# Altium PCB camadapter.PcbDoc
Units mm, origin at the board's own origin, x right, y up, seen from the top; angles counter-clockwise.
Board outline 37.6 x 30.2 mm, 4 copper layers (Top Layer, Int1 (GND), Int2 (PWR), Bottom Layer), stack 1.369 mm thick; 7 components, 27 nets, 87 pads, 4 vias.
Unrouted connection lines stored in the file: 36.
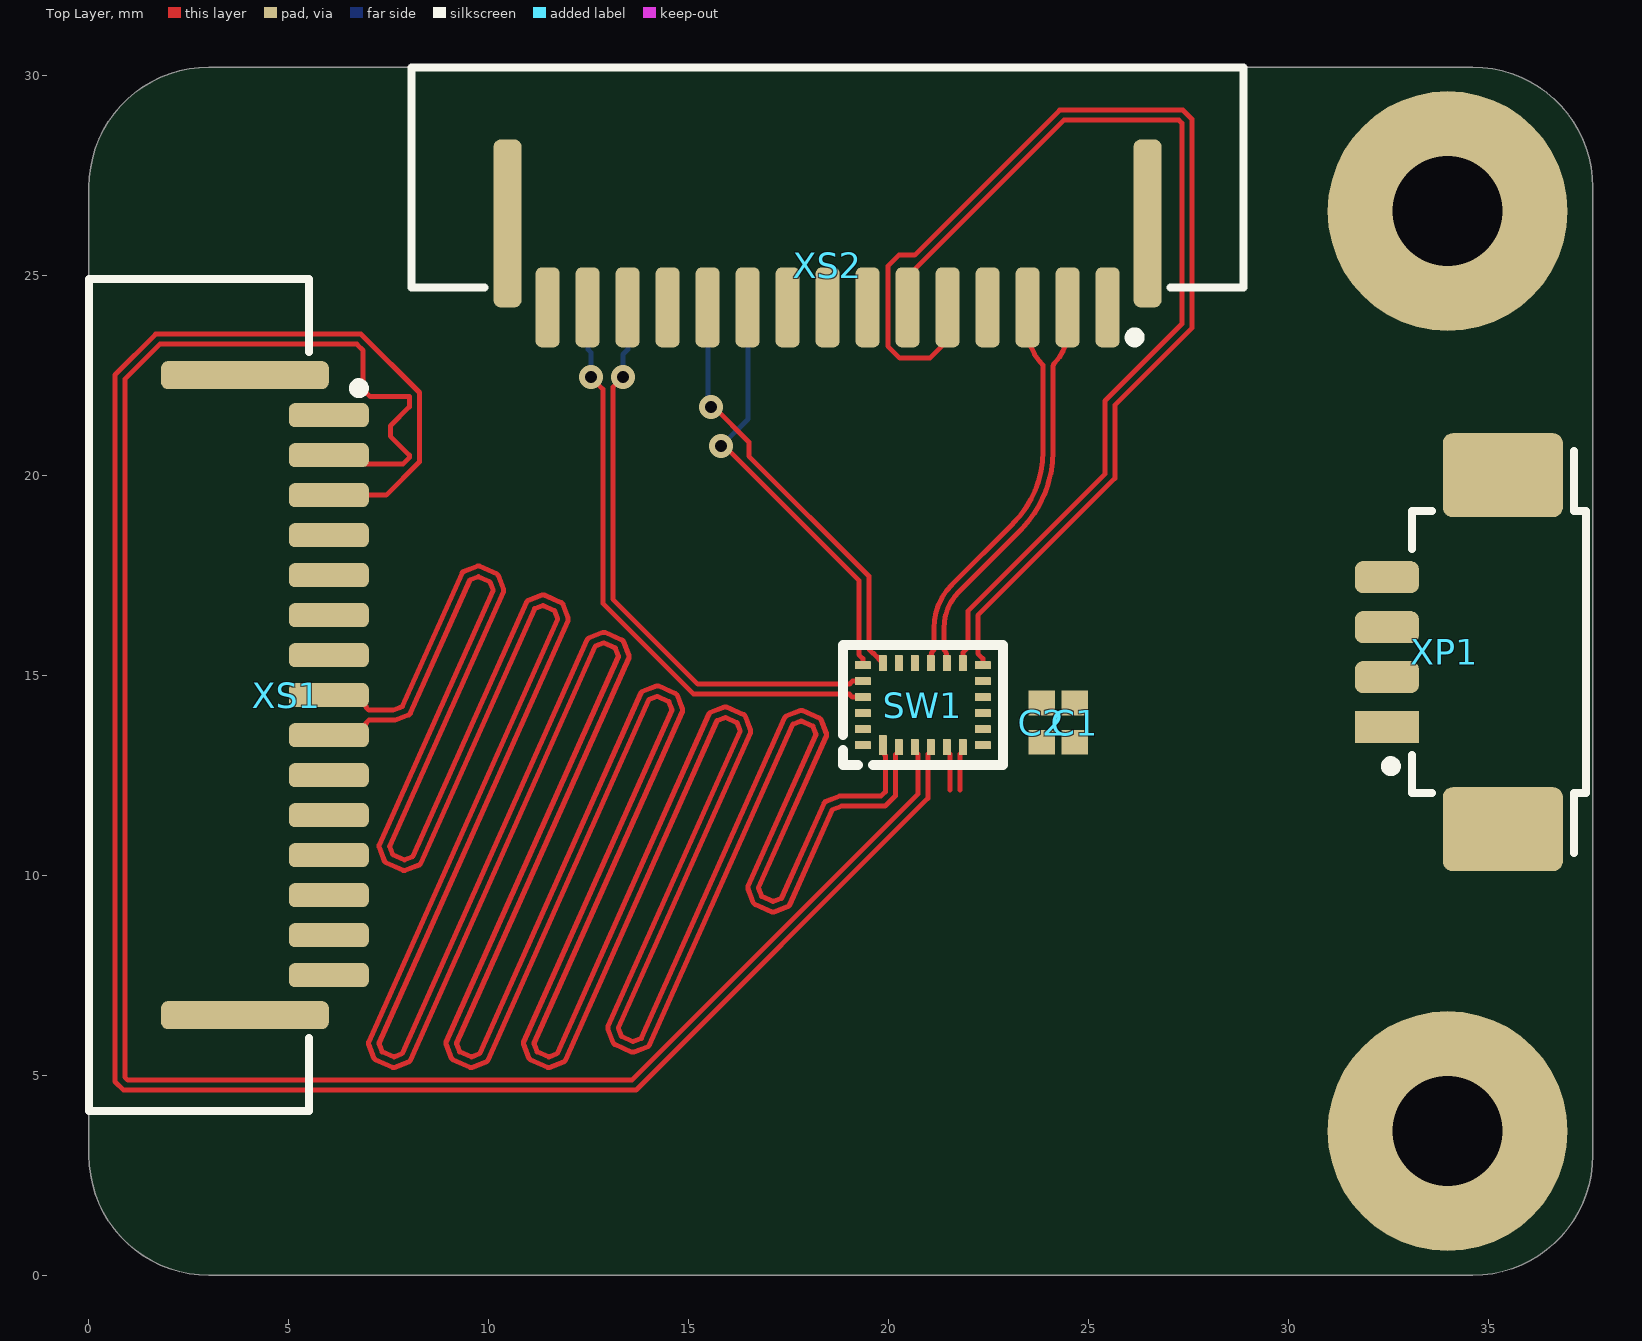
[diagram p0: Top Layer view]
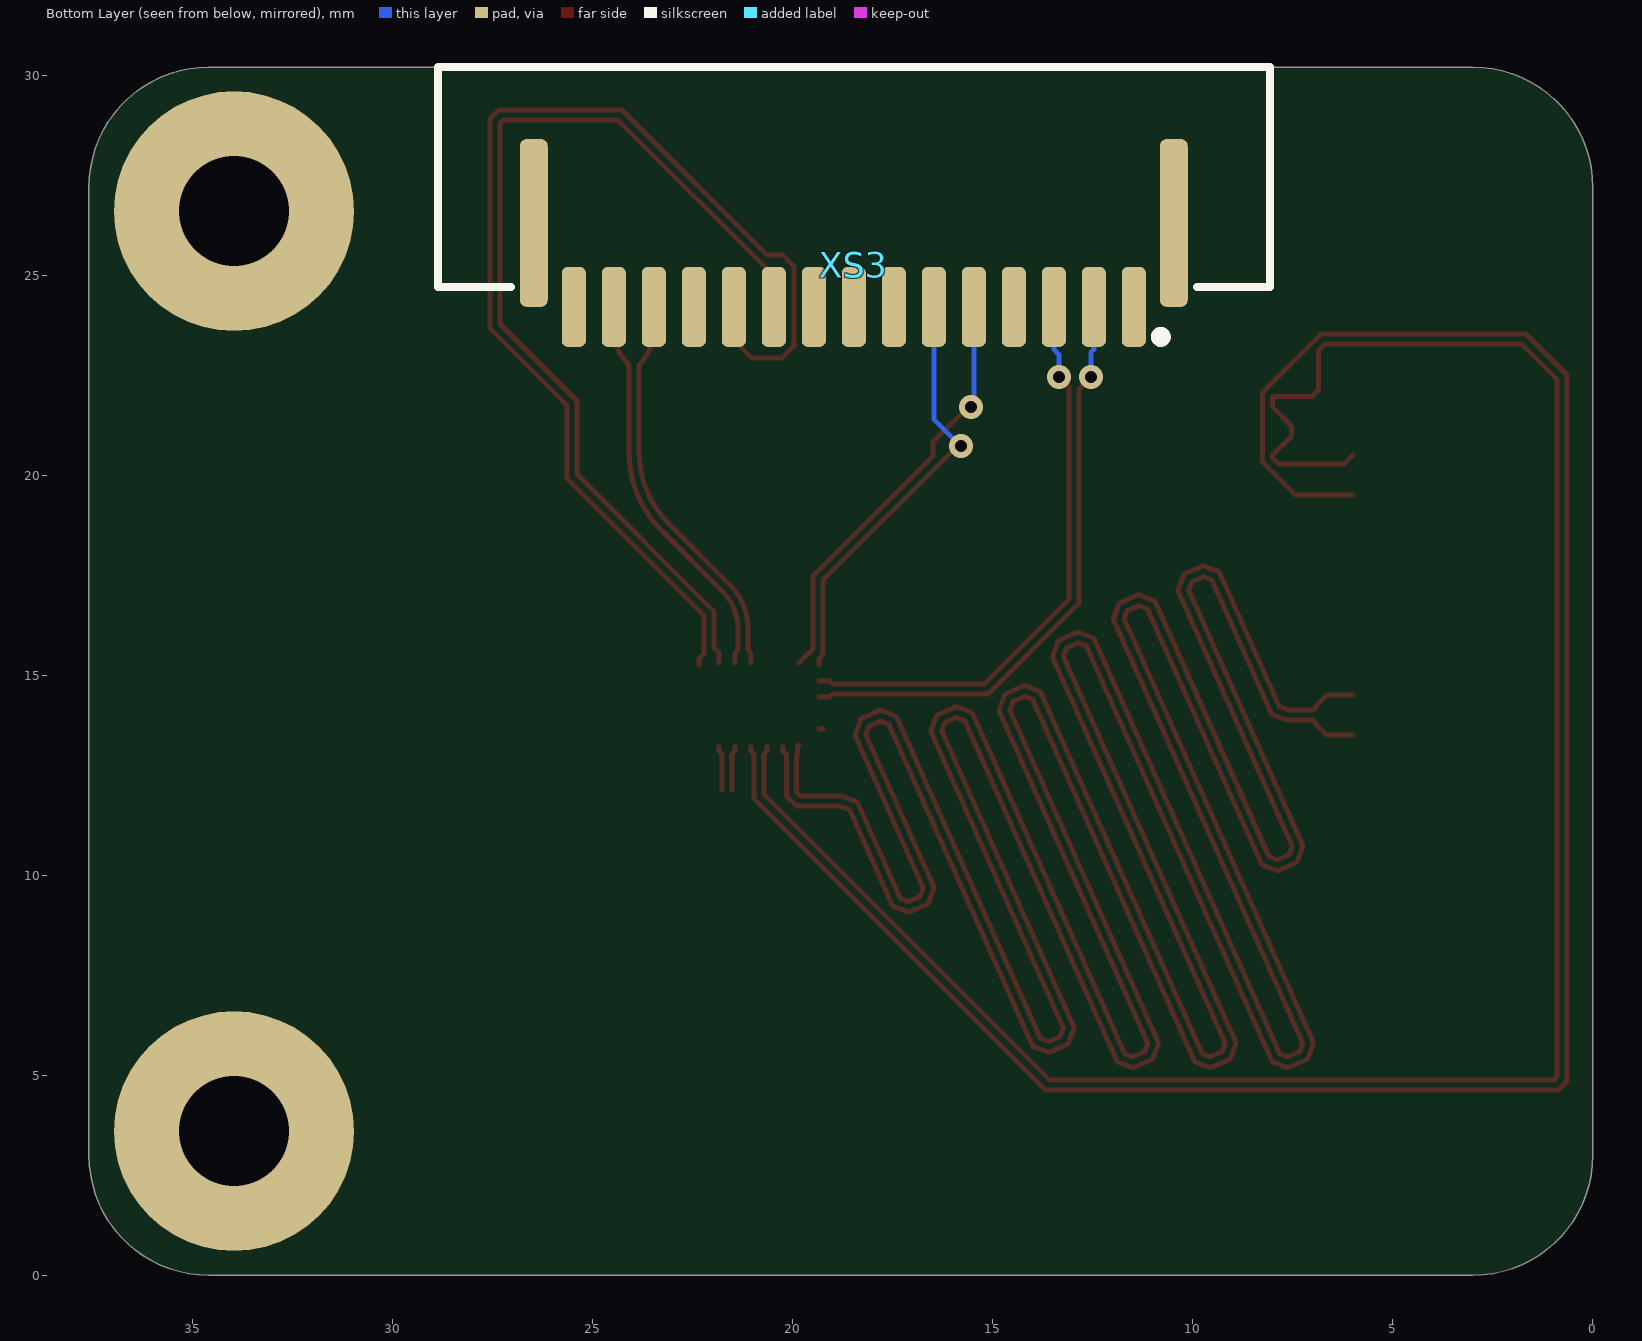
[diagram p1: Bottom Layer view, seen from below]
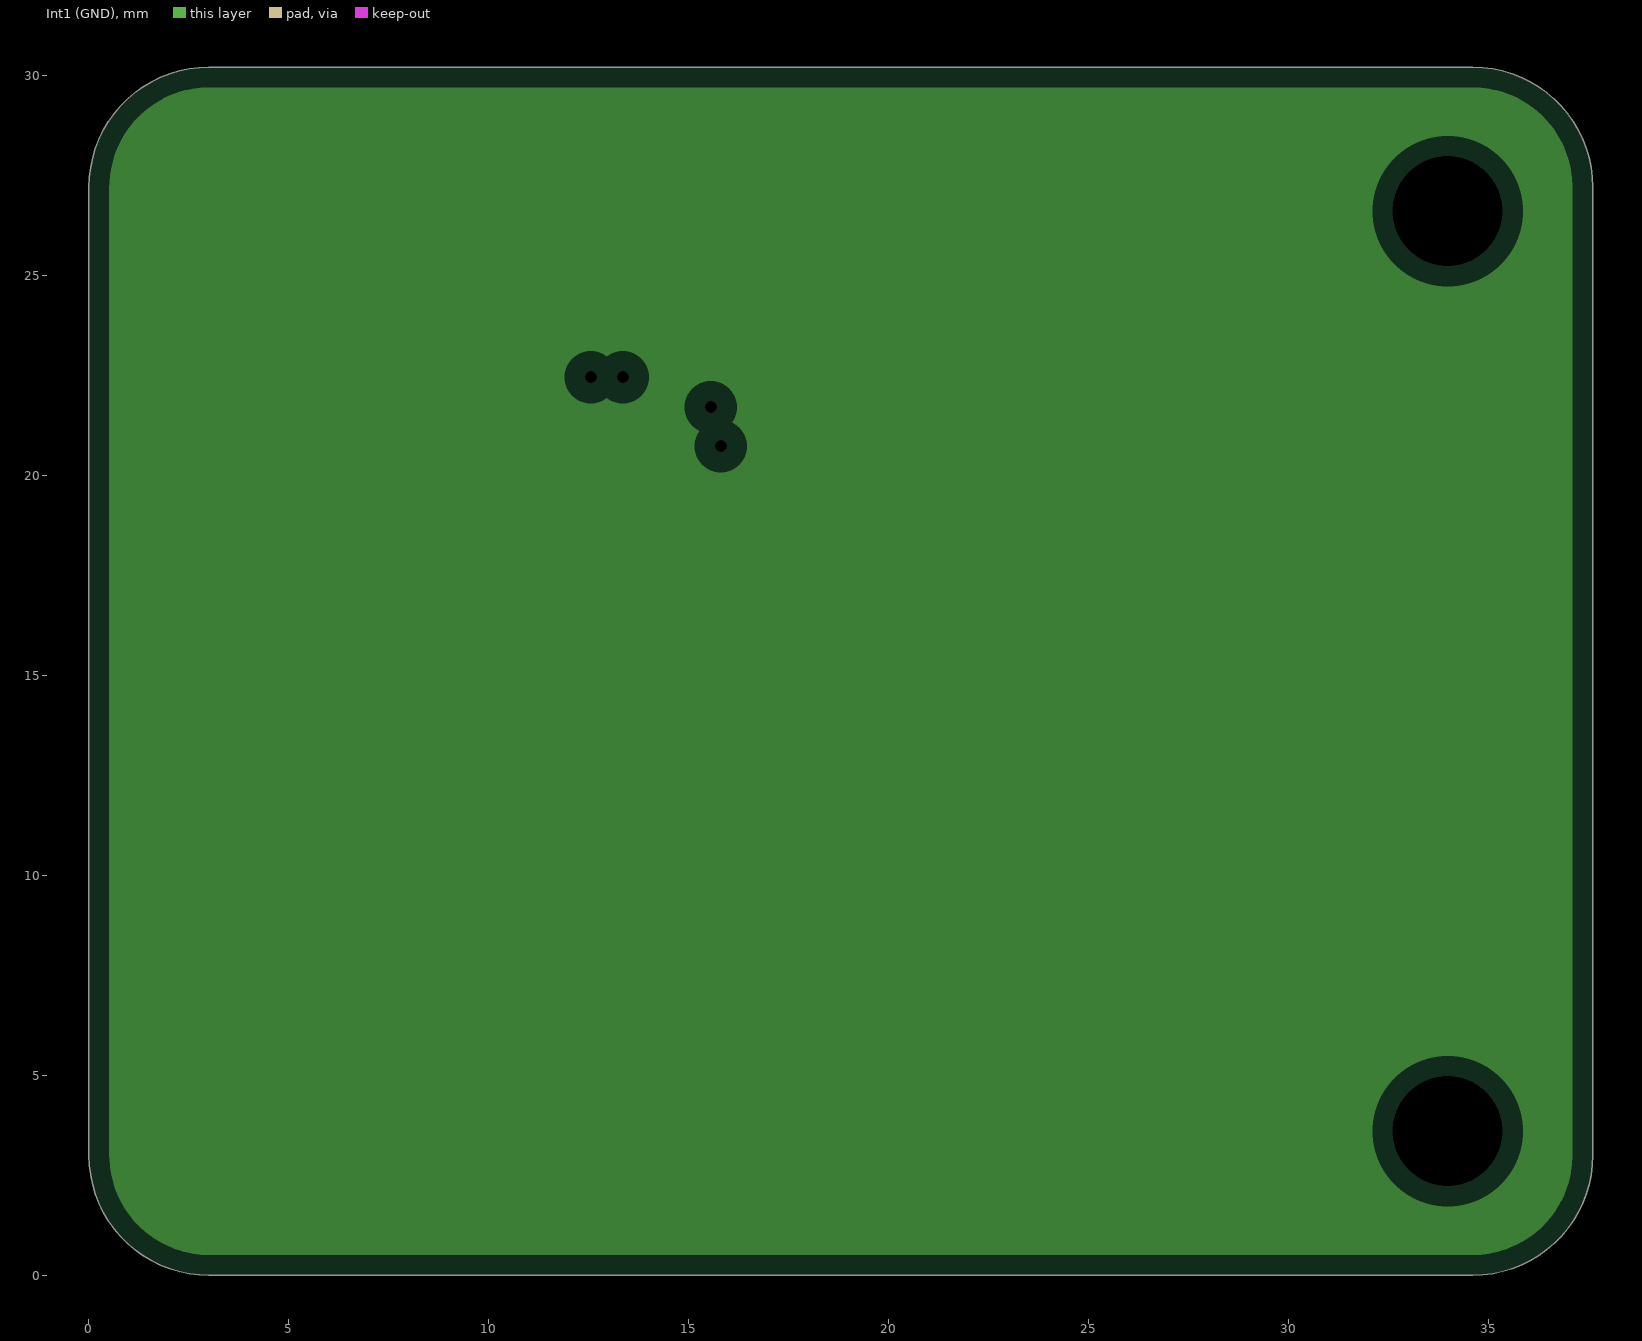
[diagram p2: Int1 (GND), clearances drawn from the general rule]
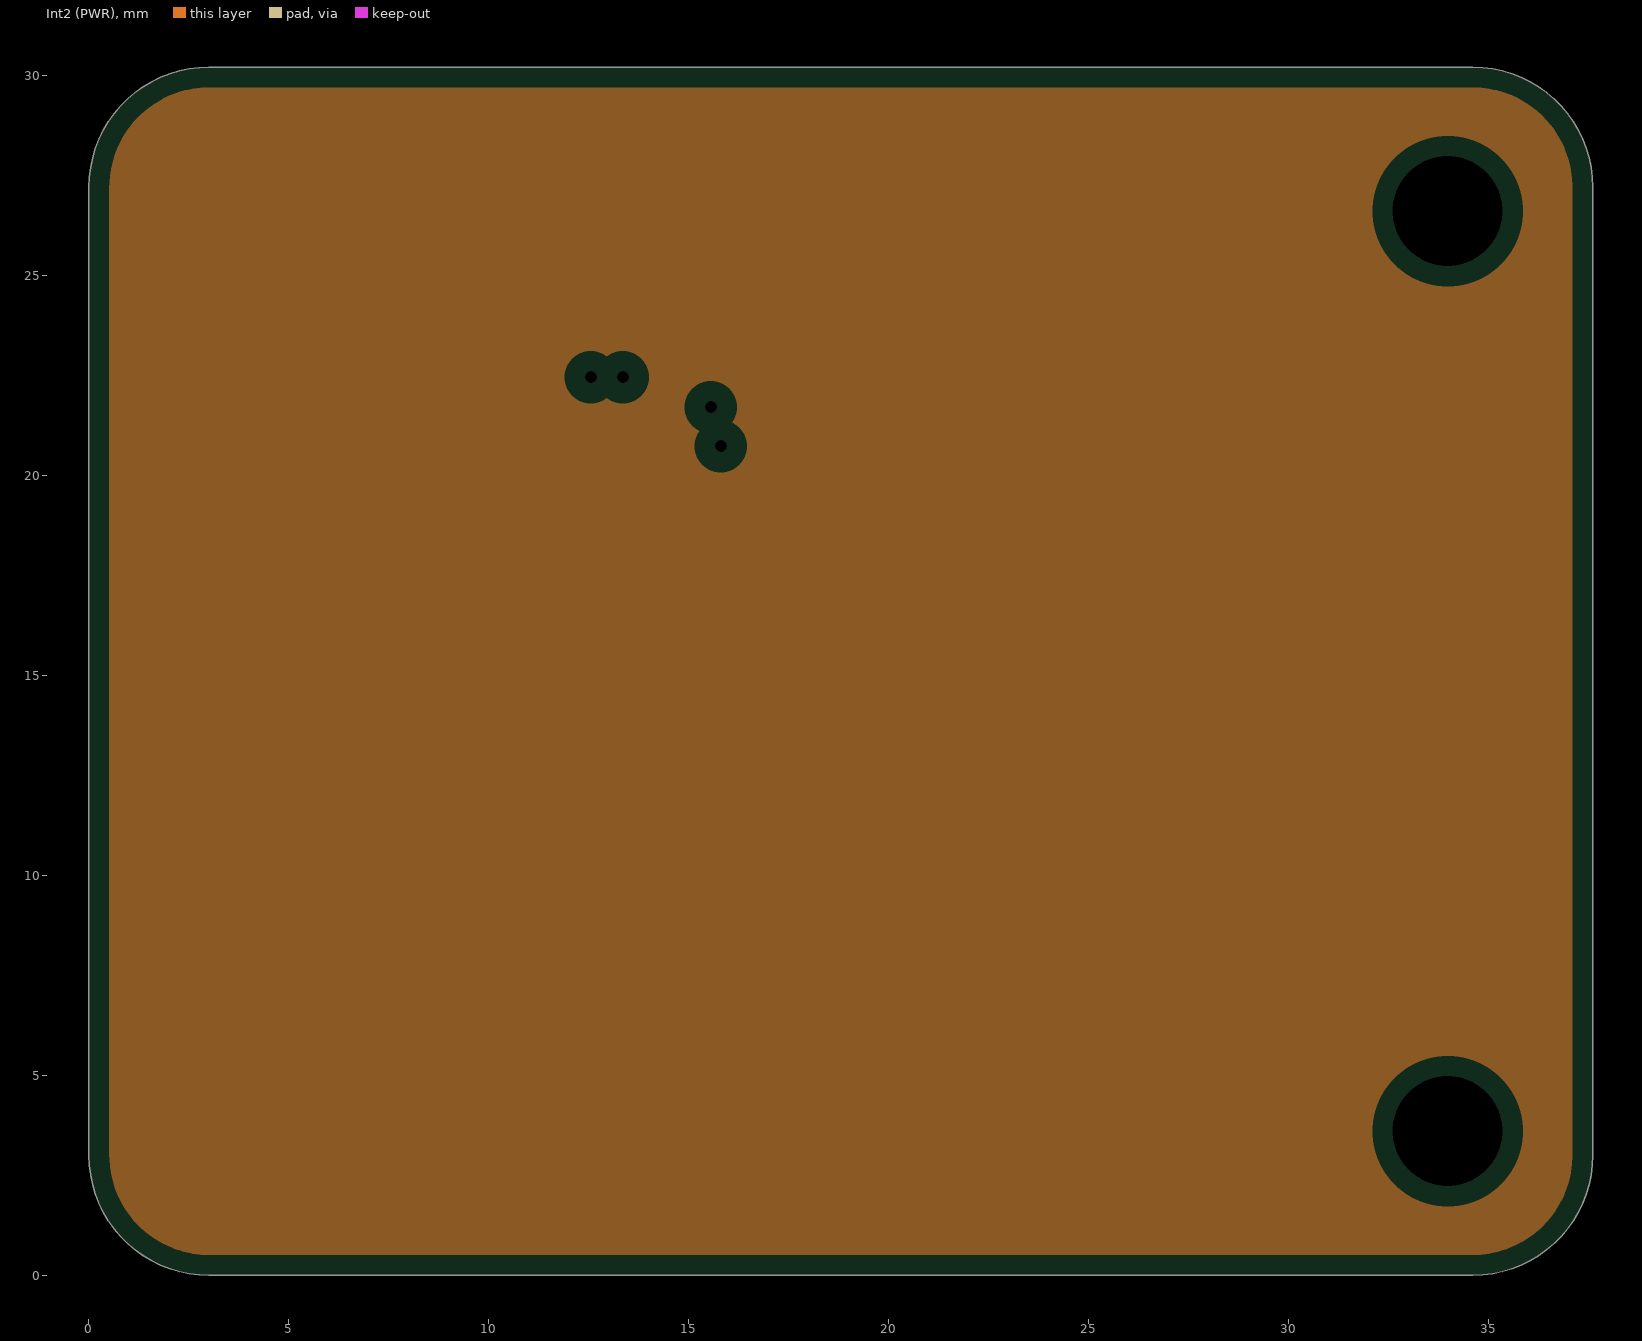
[diagram p3: Int2 (PWR), clearances drawn from the general rule]

## Layer stack, top to bottom
Top Solder: solder mask 0.0254, SM-001, Dk 4
Top Layer: signal copper 0.035
Dielectric 1: prepreg 0.1295, PP-017, Dk 4.3
Dielectric 2: prepreg 0.1295, PP-017, Dk 4.3
Int1 (GND): plane copper 0.035
Dielectric 3: core 0.7112, Core-039, Dk 4.8
Int2 (PWR): plane copper 0.035
Dielectric 4: prepreg 0.1295, PP-017, Dk 4.3
Dielectric 5: prepreg 0.1295, PP-017, Dk 4.3
Bottom Layer: signal copper 0.035
Bottom Solder: solder mask 0.0254, SM-001, Dk 4

## Board outline
0,3 ccw(c3,3) 3,0 34.6,0 ccw(c34.6,3) 37.6,3 37.6,27.2 ccw(c34.6,27.2) 34.6,30.2 3,30.2 ccw(c3,27.2) 0,27.2

## Design rules (kind name [scope] priority, off if disabled: settings)
Clearance [All] p1: gap=0.254 ignorepadtopadclearanceinfootprint=FALSE except(0: Arc-Hole Track-Hole SMDPad-Hole THPad-Hole Via-Hole Fill-Hole Poly-Hole Region-Hole Text-Hole; 0.1: Arc-Arc Arc-Track Arc-SMDPad Track-Track Track-SMDPad SMDPad-SMDPad; 0.2: Arc-Via Track-Via Via-Via)
DiffPairsRouting [All] p1: maxlimit=0.127 minlimit=0.127 mostfreqgap=0.127 toplayer_minwidth=0.125 toplayer_maxwidth=0.125 toplayer_prefwidth=0.125 bottomlayer_minwidth=0.125 bottomlayer_maxwidth=0.125 bottomlayer_prefwidth=0.125 impedanceprofiledriven=TRUE impedanceprofileid={53F7F798-1639-471B-9D0C-301AD18E4F0E} impedanceprofilevalue=50.000000 maxuncoupledlength=1
HoleSize [All] p1: absolutevalues=TRUE maxlimit=3 minlimit=0.025 maxpercent=80.000 minpercent=20.000
MatchedLengths MatchedLengths_within [All] p1: tolerance=1.5 checknetsindiffpair=TRUE checkdiffpairvsdiffpair=FALSE checkxsignals=FALSE checkothers=FALSE
MatchedLengths MatchedLengths_D1 [InNetClass('1D','D')] p2: tolerance=2 checknetsindiffpair=FALSE checkdiffpairvsdiffpair=TRUE checkxsignals=TRUE checkothers=TRUE
MinimumSolderMaskSliver [All] p1: minsoldermaskwidth=0.1
PlaneClearance [All] p1: clearance=0.508
PlaneConnect [All] p1: planeconnectstyle=Relief reliefexpansion=0.508 reliefentries=4 reliefconductorwidth=0.254 reliefairgap=0.254
PolygonConnect [All] p1: connectstyle=Relief reliefconductorwidth=0.254 reliefentries=4 polygonreliefangle="90 Angle" airgapwidth=0.254
RoutingVias [All] p1: holewidth=0.3 width=0 viastyle="Through Hole" minholewidth=0.2 minwidth=0.6 maxholewidth=0.3 maxwidth=0.6
SilkToSilkClearance [All] p1: silktosilkclearance=0.1
SilkToSolderMaskClearance [IsPad] p1: minsilkscreentomaskgap=0.1 clearancetoexposedcopper=TRUE
SolderMaskExpansion [All] p1: expansion=0.102 istentingtop=FALSE
Width [All] p1: maxlimit=1 minlimit=0.1 preferedwidth=0.254
23 further rules are at their usual default settings.

## Classes and differential pairs
net class D: 1D_N 1D_P 2D_N 2D_P
net class D2: 1D2_N 1D2_P 2D2_N 2D2_P
net class D1: 1D1_N 1D1_P 2D1_N 2D1_P
differential pair CLK: +CLK_P -CLK_N
differential pair CLK2: +CLK2_P -CLK2_N
differential pair CLK1: +CLK1_P -CLK1_N
differential pair 2D: +2D_P -2D_N
differential pair 2D2: +2D2_P -2D2_N
differential pair 2D1: +2D1_P -2D1_N
differential pair 1D: +1D_P -1D_N
differential pair 1D2: +1D2_P -1D2_N
differential pair 1D1: +1D1_P -1D1_N

## Components (designator, comment, footprint, x,y, rotation, side; value= is the part's Value field where it differs from the comment)
C1 "100nF" Cap_0402_N 24.65,13.815 r270 top
C2 "2.2uF" Cap_0402_N 23.825,13.815 r270 top
SW1 "NX3DV642" NX3DV642 20.85,14.25 r90 top
XP1 "653104131822" 653104131822_D_arch 35.25,15.575 r90 top
XS1 "SFW15R-1STE1LF" SFW15R-1STE1LF_D 3.9,14.5 r270 top
XS2 "SFW15R-1STE1LF" SFW15R-1STE1LF_D 18.47,26.295 r180 top
XS3 "SFW15R-1STE1LF" SFW15R-1STE1LF_D 18.477,26.307 r0 bottom

## Footprints (in the part's own frame and the unit in brackets; to place one, negate y for a bottom-side part, rotate by r counter-clockwise, add the part's x,y. Pads: shape width x height; smd on the part's side, far side on the other; paste and mask are expansions set on the pad)
653104131822_D_arch [mm] "1.25mm SMT Male Horizontal Shrouded Header, 4p"
  rect 0.8x1.6 smd: 1(-1.875,2.8)
  rrect50% 0.8x1.6 smd: 2(-0.625,2.8) 3(0.625,2.8) 4(1.875,2.8)
  rrect23% 2.1x3 smd: MP1(-4.425,-0.1) MP2(4.425,-0.1)
  silkscreen extent -5.02,-2.17 5.02,2.82, body extent -4.88,-2.1 4.88,3.3, height 3.4
Cap_0402_N [mm] "Chip Capacitor, 2-Leads, Body 1,05x0,54mm, IPC Medium Density"
  rect 0.62x0.66 smd: 1(-0.49,0) 2(0.49,0)
  body extent -0.5,-0.26 0.5,0.27, height 0.36
NX3DV642 [mm]
  rrect10% 0.5x0.2 smd mask+0.05: 1(-1,1)
  rrect10% 0.4x0.2 smd mask+0.05: 2(-1.05,0.6) 3(-1.05,0.2) 4(-1.05,-0.2) 5(-1.05,-0.6) 6(-1.05,-1) 13(1.05,-1) 14(1.05,-0.6) 15(1.05,-0.2) 16(1.05,0.2) 17(1.05,0.6) 18(1.05,1)
  rrect10% 0.2x0.4 smd mask+0.05: 7(-1,-1.5) 8(-0.6,-1.5) 9(-0.2,-1.5) 10(0.2,-1.5) 11(0.6,-1.5) 12(1,-1.5) 19(1,1.5) 20(0.6,1.5) 21(0.2,1.5) 22(-0.2,1.5) 23(-0.6,1.5) 24(-1,1.5)
  silkscreen extent -1.5,-2 1.5,2
SFW15R-1STE1LF_D [mm] "FFC/FPC connector, 15-Pins, Right Angle, Body 20.8x5.5mm, Datasheet dimentions"
  rrect50% 0.6x2 smd: 1(-7,2.1) 2(-6,2.1) 3(-5,2.1) 4(-4,2.1) 5(-3,2.1) 6(-2,2.1) 7(-1,2.1) 8(0,2.1) 9(1,2.1) 10(2,2.1) 11(3,2.1) 12(4,2.1) 13(5,2.1) 14(6,2.1) 15(7,2.1)
  rrect50% 0.7x4.2 smd: MP1(-8,0) MP2(8,0)
  silkscreen extent -10.4,-3.9 10.4,2.98, body extent -10.4,-3.9 10.4,2.6

## Part data
C1 C2: library part Cap_0402, "Capacitor", Part Number="Capacitor 0402", Type=Capacitor
XP1: "Header, Pins, 4 Contacts, SMD, R/A, 0,049\" (1,25mm)."
XS1 XS2 XS3: "FFC-FPC Connector, 15 Contacts, SMD, R/A, 0.039\" (1.00mm)."

## Free pads (board coordinates)
  round 6 hole 2.75: MOUNT(33.97,3.6) MOUNT(33.97,26.6)

## Via types
v1: diameter 0.6, hole 0.3, Top Layer to Bottom Layer, 4 vias

## Nets (pads, with @x,y where several pads share a name; then routed paths per layer and width w, separated by ;. In a path a pad name is that pad's centre, name@x,y a point inside that pad or via, vN(x,y) a via of type N, cw(c..) or ccw(c..) an arc to the next point about the centre after c; other vN are vias at no path point)
1D1_N: SW1.14 XS2.2 | length 10
  Top Layer w0.125: SW1.14 21.45,15.457 ccw(c21.197,15.457) 21.376,15.637 21.376,16.175 cw(c22.661,16.175) 21.752,17.084 23.284,18.616 ccw(c21.31,20.59) 24.102,20.59 24.102,22.7 cw(c24.256,22.7) 24.147,22.81 ccw(c23.368,23.589) 24.47,23.589 XS2.2
1D1_P: SW1.15 XS2.3 | length 10
  Top Layer w0.125: SW1.15 21.05,15.457 cw(c21.303,15.457) 21.124,15.637 21.124,16.175 cw(c22.661,16.175) 21.574,17.262 23.106,18.793 ccw(c21.31,20.59) 23.85,20.59 23.85,22.752 cw(c24.768,23.67) 23.47,23.67 XS2.3
1D2_N: SW1.21 XS3.2 | length 15
  Top Layer w0.125: v1(12.55,22.45) 12.85,22.15 12.85,16.794 15.12,14.524 19.013,14.524 19.088,14.45 SW1.21
  Bottom Layer w0.125: XS3.2 12.477,23.145 12.55,23.072 v1(12.55,22.45)
1D2_P: SW1.20 XS3.3 | length 14.6
  Top Layer w0.125: v1(13.35,22.45) 13.1,22.2 13.1,16.9 15.224,14.776 19.013,14.776 19.088,14.85 SW1.20
  Bottom Layer w0.125: v1(13.35,22.45) 13.35,23.018 13.477,23.145 XS3.3
1D_N: SW1.3 XS1.2 | length 54.2
  Top Layer w0.125: XS1.2 6.225,20.275 7.85,20.275 8.013,20.438 8.013,20.5 7.535,20.977 7.535,21.231 8.013,21.709 8.013,21.963 7.036,21.963 6.857,22.142 6.857,23.118 6.813,23.163 6.7,23.275 1.775,23.275 0.9,22.4 0.9,4.948 0.973,4.875 13.574,4.875 20.724,12.025 20.724,12.738 20.724,13.026 20.65,13.1 SW1.3
1D_P: SW1.4 XS1.3 | length 55.4
  Top Layer w0.125: XS1.3 7.431,19.5 8.264,20.333 8.264,22.067 6.804,23.527 1.671,23.527 0.648,22.504 0.648,4.844 0.869,4.623 13.678,4.623 20.976,11.921 20.976,12.634 20.976,13.026 21.05,13.1 SW1.4
2D1_N: SW1.12 XS2.5 | length 29.9
  Top Layer w0.125: XS2.5 21.47,23.37 21.025,22.925 20.275,22.925 19.975,23.225 19.975,25.225 20.25,25.5 20.644,25.5 24.271,29.127 27.353,29.127 27.575,28.904 27.575,23.675 25.65,21.75 25.65,19.919 22.226,16.495 22.226,15.537 22.35,15.412 SW1.12
2D1_P: SW1.13 XS2.6 | length 25
  Top Layer w0.125: XS2.6 20.47,24.97 24.375,28.875 27.248,28.875 27.323,28.8 27.323,23.779 25.398,21.854 25.398,20.023 21.974,16.599 21.974,15.687 21.85,15.562 SW1.13
2D2_N: SW1.18 XS3.5 | length 10.8
  Top Layer w0.125: v1(15.55,21.7) 15.631,21.7 16.5,20.831 16.5,20.475 19.502,17.473 19.502,17.082 19.502,15.648 19.611,15.539 19.623,15.539 19.739,15.423 19.739,15.411 SW1.18
  Bottom Layer w0.125: XS3.5 15.477,21.773 v1(15.55,21.7)
2D2_P: SW1.19 XS3.6 | length 10.8
  Top Layer w0.125: v1(15.8,20.725) 15.894,20.725 19.25,17.369 19.25,16.794 19.25,16.444 19.25,16.275 19.25,15.512 19.35,15.412 SW1.19
  Bottom Layer w0.125: v1(15.8,20.725) 16.477,21.402 XS3.6
2D_N: SW1.5 XS1.5 | length 1.1
  Top Layer w0.125: SW1.5 21.45,13.1 21.524,13.026 21.524,12.788 21.524,12.125
2D_P: SW1.6 XS1.6 | length 1.1
  Top Layer w0.125: 21.776,12.125 21.776,12.684 21.776,13.026 21.85,13.1 SW1.6
3V3: C1.2 C2.2 XP1.1 XS1.15 XS2.15 XS3.15
CLK1_N: SW1.17 XS2.8
CLK1_P: SW1.16 XS2.9
CLK2_N: SW1.23 XS3.8 | length 0.1
  Top Layer w0.125: SW1.23@19.25,13.65 SW1.23
CLK2_P: SW1.22 XS3.9 | length 0.7
  Bottom Layer w0.125: XS3.9 XS3.9@19.477,24.86
CLK_N: SW1.1 XS1.8 | length 121.1
  Top Layer w0.125: XS1.8 6.653,14.5 6.926,14.227 6.926,14.199 6.999,14.126 7.169,14.126 7.601,14.126 7.837,14.216 9.33,17.555 9.365,17.59 9.718,17.725 9.768,17.725 10.198,17.533 10.233,17.498 10.368,17.145 10.368,17.095 7.519,10.72 7.599,10.511 7.887,10.382 8.096,10.462 10.944,16.833 10.98,16.869 11.333,17.004 11.383,17.004 11.812,16.812 11.848,16.776 11.982,16.423 11.982,16.373 7.254,5.794 7.334,5.585 7.623,5.456 7.831,5.536 12.464,15.9 12.499,15.935 12.852,16.07 12.902,16.07 13.332,15.878 13.367,15.842 13.502,15.489 13.502,15.439 9.191,5.794 9.271,5.585 9.559,5.456 9.768,5.536 13.802,14.561 13.838,14.596 14.191,14.731 14.241,14.731 14.67,14.539 14.706,14.504 14.841,14.151 14.841,14.101 11.128,5.794 11.208,5.585 11.496,5.456 11.705,5.536 15.504,14.035 15.539,14.07 15.892,14.205 15.942,14.205 16.372,14.013 16.407,13.978 16.542,13.625 16.542,13.575 13.236,6.178 13.316,5.969 13.605,5.84 13.814,5.919 17.402,13.947 17.437,13.982 17.79,14.117 17.84,14.117 18.27,13.925 18.305,13.89 18.44,13.537 18.44,13.487 16.739,9.68 16.818,9.471 17.107,9.342 17.316,9.422 18.381,11.805 18.417,11.84 18.77,11.975 19.055,11.975 19.8,11.975 19.91,12.085 19.91,12.989 19.888,13.012 19.888,13.212 SW1.1
CLK_P: SW1.2 XS1.9 | length 121.4
  Top Layer w0.125: XS1.9 6.653,13.5 6.926,13.773 6.926,13.801 6.999,13.874 7.056,13.874 7.648,13.874 8.001,14.009 8.036,14.045 9.529,17.383 9.738,17.463 10.026,17.334 10.106,17.125 7.257,10.751 7.257,10.701 7.392,10.348 7.427,10.312 7.857,10.12 7.907,10.12 8.26,10.255 8.295,10.291 11.143,16.662 11.352,16.742 11.641,16.613 11.721,16.404 6.992,5.825 6.992,5.775 7.127,5.422 7.162,5.386 7.592,5.194 7.642,5.194 7.995,5.329 8.03,5.365 12.663,15.728 12.872,15.808 13.16,15.679 13.24,15.47 8.929,5.825 8.929,5.775 9.064,5.422 9.099,5.386 9.529,5.194 9.579,5.194 9.932,5.329 9.967,5.365 14.001,14.39 14.21,14.469 14.499,14.34 14.579,14.131 10.866,5.825 10.866,5.775 11.001,5.422 11.036,5.386 11.466,5.194 11.516,5.194 11.869,5.329 11.904,5.365 15.703,13.863 15.912,13.943 16.201,13.814 16.281,13.605 12.974,6.208 12.974,6.158 13.109,5.805 13.145,5.77 13.574,5.578 13.624,5.578 13.977,5.713 14.013,5.748 17.601,13.776 17.81,13.855 18.098,13.726 18.178,13.517 16.477,9.711 16.477,9.661 16.612,9.308 16.647,9.272 17.077,9.08 17.127,9.08 17.48,9.215 17.515,9.25 18.58,11.633 18.816,11.723 18.943,11.723 19.904,11.723 20.162,11.981 20.162,13.012 20.25,13.1 SW1.2
GND: SW1.9 XP1.2 XS1.1 XS1.4 XS1.7 XS1.10 XS2.1 XS2.4 XS2.7 XS2.10 XS3.1 XS3.4 XS3.7 XS3.10
IO0: XS1.12 XS2.12 XS3.12
IO1: XS1.11 XS2.11 XS3.11
NetC1_1: C1.1 C2.1 SW1.10
NetSW1_8: SW1.8 XP1.3
NetSW1_11: SW1.11 XP1.4
SCL: XS1.13 XS2.13 XS3.13
SDA: XS1.14 XS2.14 XS3.14
pads on no net: SW1.7 SW1.24 XP1.MP1 XP1.MP2 XS1.MP1 XS1.MP2 XS2.MP1 XS2.MP2 XS3.MP1 XS3.MP2

## Polygon pours and split planes (outlines as drawn)
no net on Int1 (GND) (split plane): 34.817,29.682 35.033,29.654 35.245,29.607 35.452,29.542 35.653,29.458 35.846,29.358 36.029,29.241 36.202,29.109 36.362,28.962 36.509,28.802 36.641,28.629 36.758,28.446 36.858,28.253 36.942,28.052 37.007,27.845 37.054,27.633 37.082,27.417 37.091,27.216 37.09,27.2 37.09,3 37.091,2.984 37.082,2.783 37.054,2.567 37.007,2.355 36.942,2.148 36.858,1.947 36.758,1.754 36.641,1.571 36.509,1.398 36.362,1.238 36.202,1.091 36.029,0.959 35.846,0.842 35.653,0.742 35.452,0.658 35.245,0.593 35.033,0.546 34.817,0.518 34.616,0.509 34.6,0.51 3,0.51 2.984,0.509 2.783,0.518 2.567,0.546 2.355,0.593 2.148,0.658 1.947,0.742 1.754,0.842 1.571,0.959 1.398,1.091 1.238,1.238 1.091,1.398 0.959,1.571 0.842,1.754 0.742,1.947 0.658,2.148 0.593,2.355 0.546,2.567 0.518,2.783 0.509,2.984 0.51,3 0.51,27.2 0.509,27.216 0.518,27.417 0.546,27.633 0.593,27.845 0.658,28.052 0.742,28.253 0.842,28.446 0.959,28.629 1.091,28.802 1.238,28.962 1.398,29.109 1.571,29.241 1.754,29.358 1.947,29.458 2.148,29.542 2.355,29.607 2.567,29.654 2.783,29.682 2.984,29.691 3,29.69 34.6,29.69 34.616,29.691
no net on Int2 (PWR) (split plane): 34.817,29.682 35.033,29.654 35.245,29.607 35.452,29.542 35.653,29.458 35.846,29.358 36.029,29.241 36.202,29.109 36.362,28.962 36.509,28.802 36.641,28.629 36.758,28.446 36.858,28.253 36.942,28.052 37.007,27.845 37.054,27.633 37.082,27.417 37.091,27.216 37.09,27.2 37.09,3 37.091,2.984 37.082,2.783 37.054,2.567 37.007,2.355 36.942,2.148 36.858,1.947 36.758,1.754 36.641,1.571 36.509,1.398 36.362,1.238 36.202,1.091 36.029,0.959 35.846,0.842 35.653,0.742 35.452,0.658 35.245,0.593 35.033,0.546 34.817,0.518 34.616,0.509 34.6,0.51 3,0.51 2.984,0.509 2.783,0.518 2.567,0.546 2.355,0.593 2.148,0.658 1.947,0.742 1.754,0.842 1.571,0.959 1.398,1.091 1.238,1.238 1.091,1.398 0.959,1.571 0.842,1.754 0.742,1.947 0.658,2.148 0.593,2.355 0.546,2.567 0.518,2.783 0.509,2.984 0.51,3 0.51,27.2 0.509,27.216 0.518,27.417 0.546,27.633 0.593,27.845 0.658,28.052 0.742,28.253 0.842,28.446 0.959,28.629 1.091,28.802 1.238,28.962 1.398,29.109 1.571,29.241 1.754,29.358 1.947,29.458 2.148,29.542 2.355,29.607 2.567,29.654 2.783,29.682 2.984,29.691 3,29.69 34.6,29.69 34.616,29.691

## Silkscreen, mask and mechanical layers (free items; w line width, h text height)
Mechanical 1:
  lines w0.25: 0,3 ccw(c3,3) 3,0 ; 0,27.2 cw(c3,27.2) 3,30.2 ; 34.6,0 ccw(c34.6,3) 37.6,3 ; 34.6,30.2 cw(c34.6,27.2) 37.6,27.2

## Text inside footprints (layer, text, board x,y; h text height)
XP1: Top Assembly "1" at 32.3,13.325 h0.5 r270